# Altium PCB test.PcbDoc
Units mm, origin at the board's own origin, x right, y up, seen from the top; angles counter-clockwise.
Board outline 80 x 60 mm, 4 copper layers (Top Layer, GND, VCC, Bottom Layer), stack 0.783 mm thick; 105 components, 61 nets, 317 pads, 86 vias.
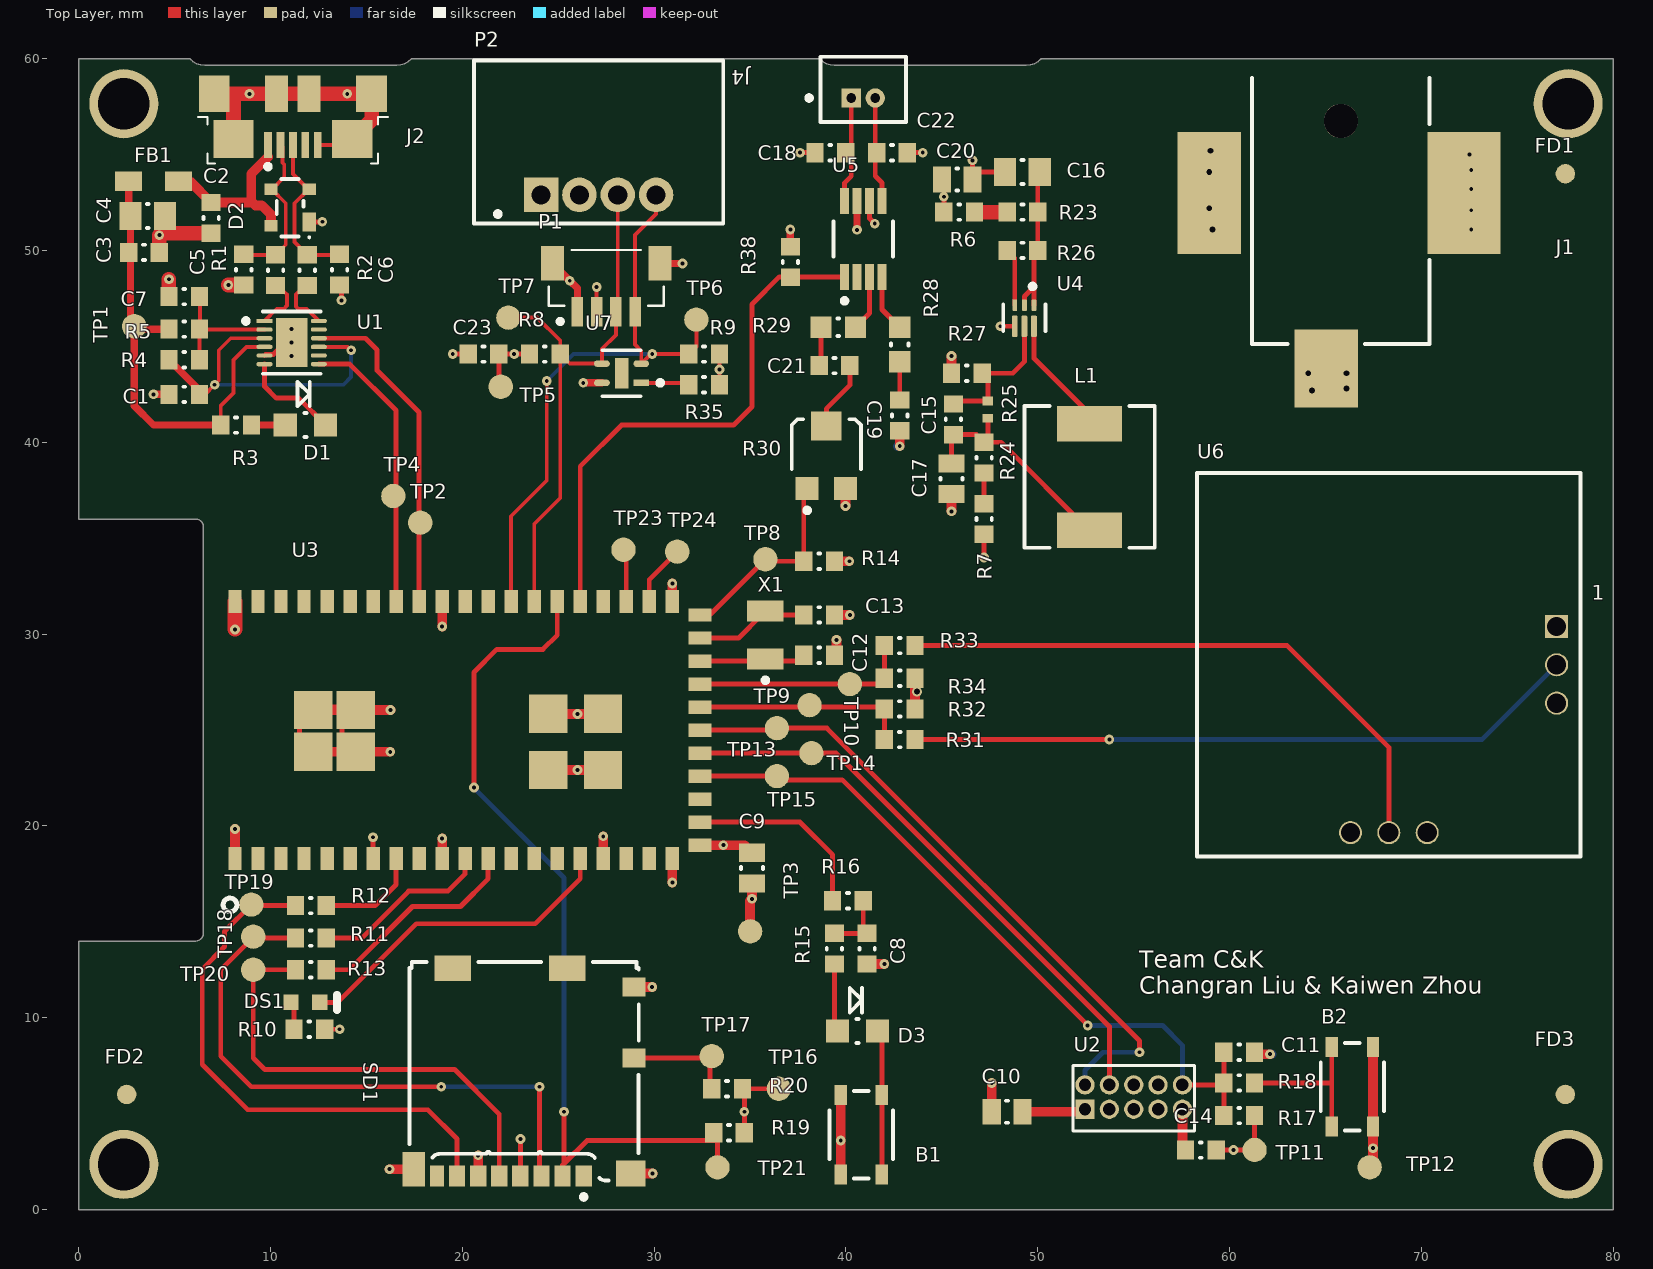
[diagram p0: Top Layer view]
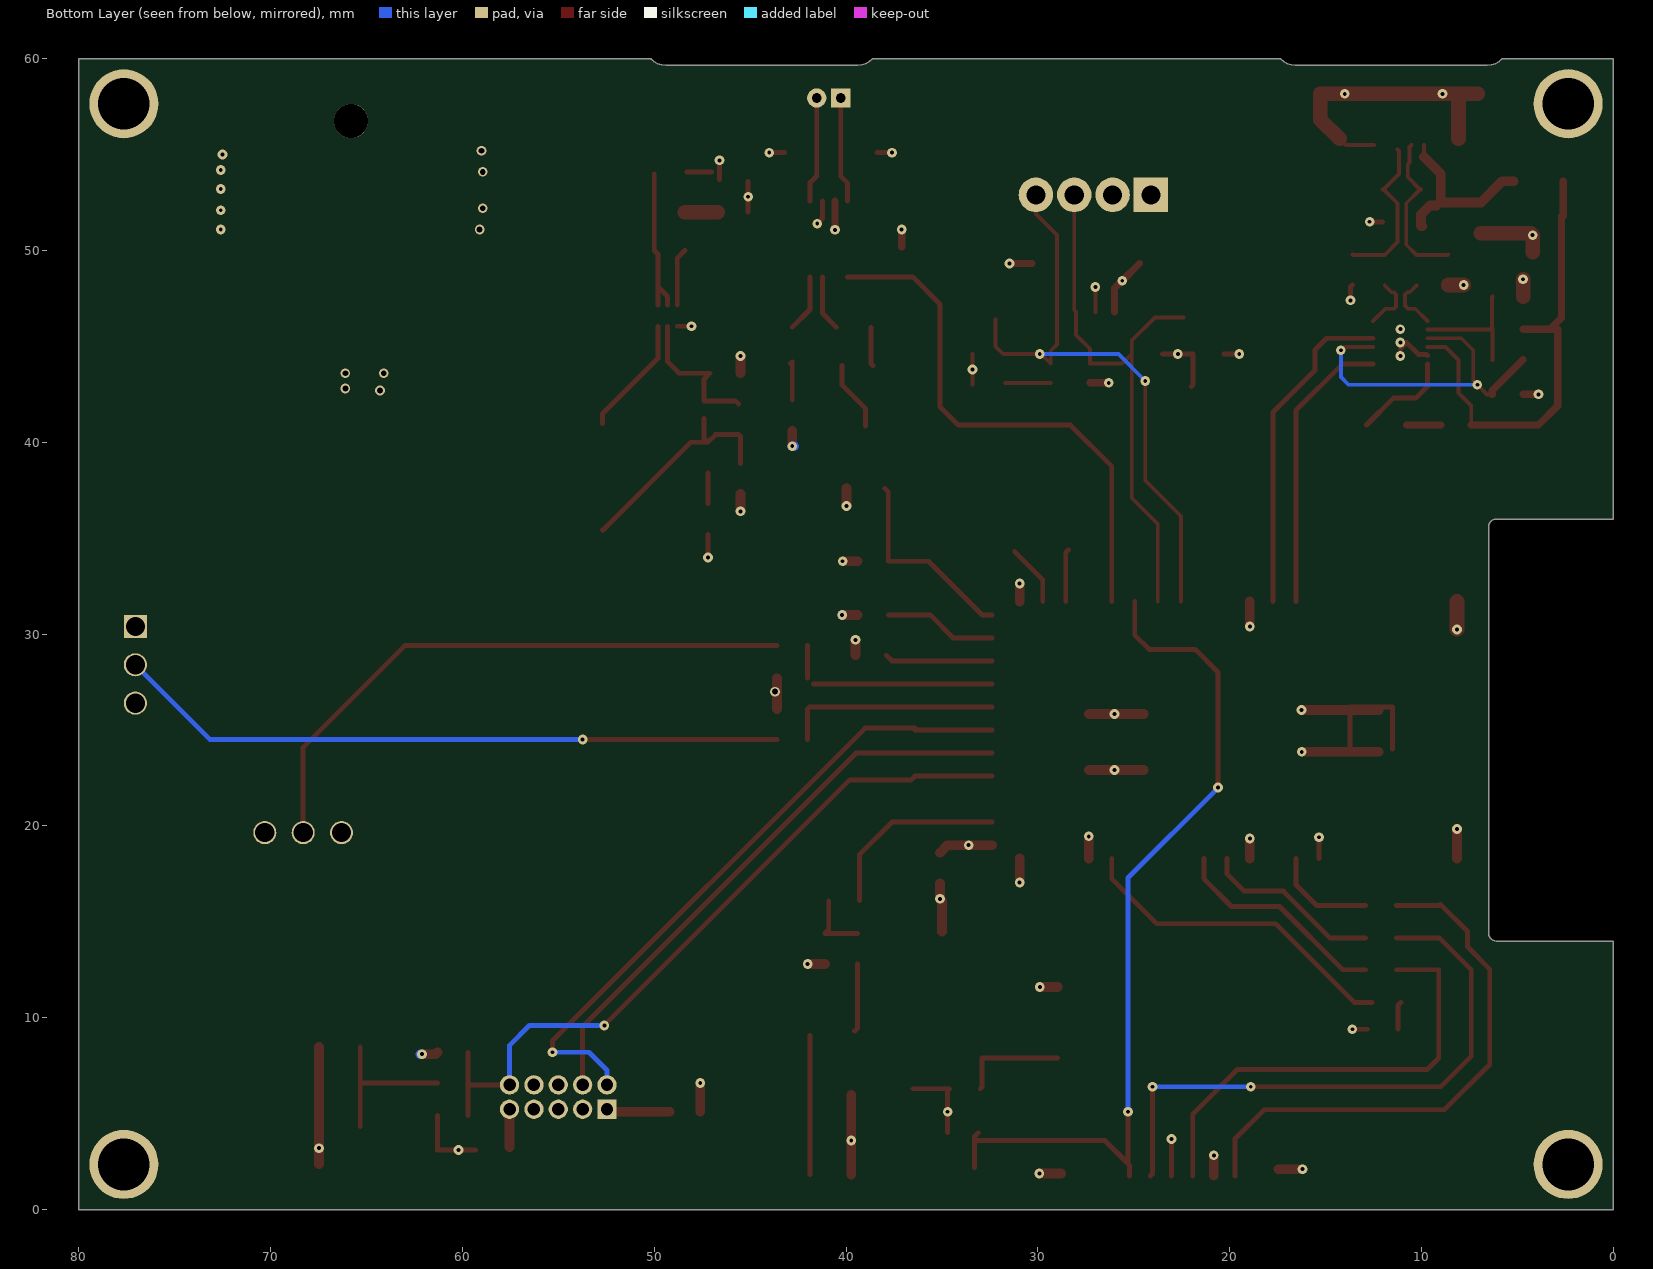
[diagram p1: Bottom Layer view, seen from below]
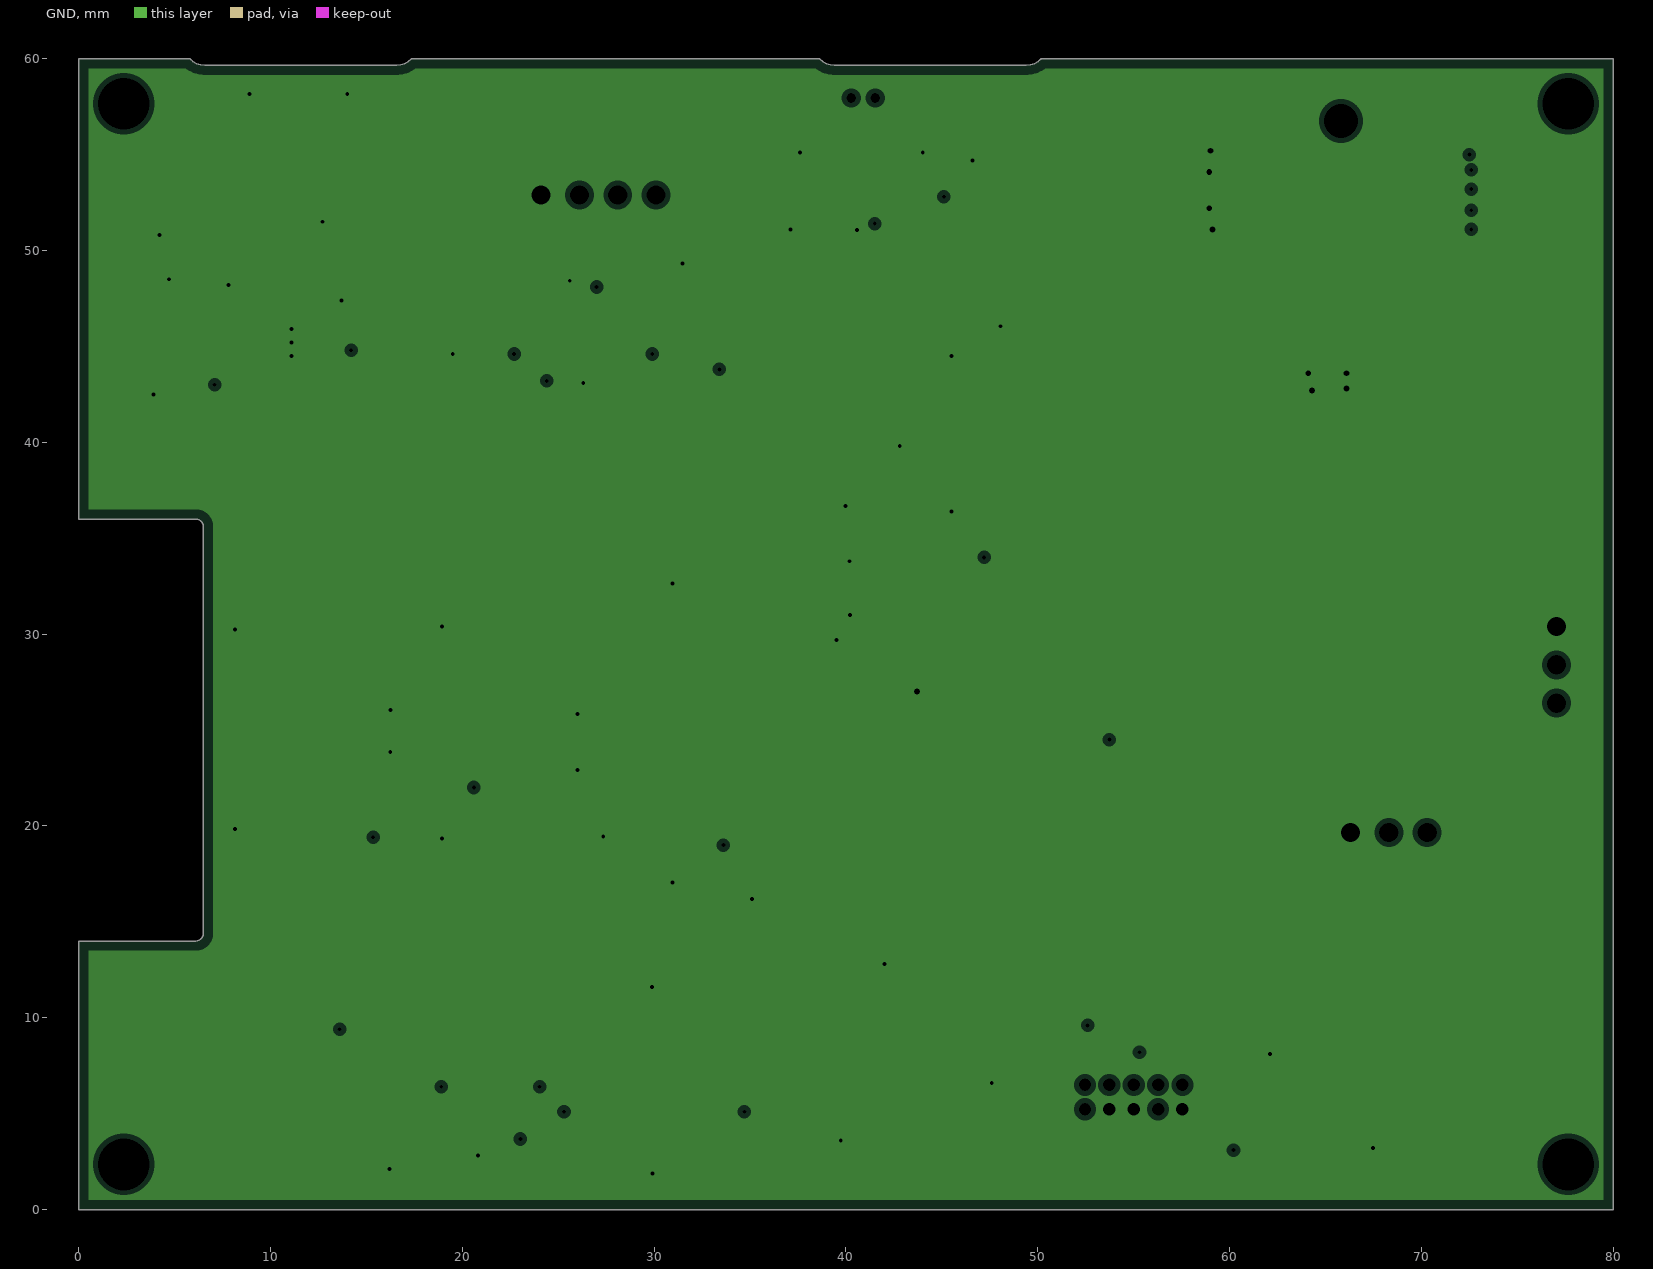
[diagram p2: GND, clearances drawn from the general rule]
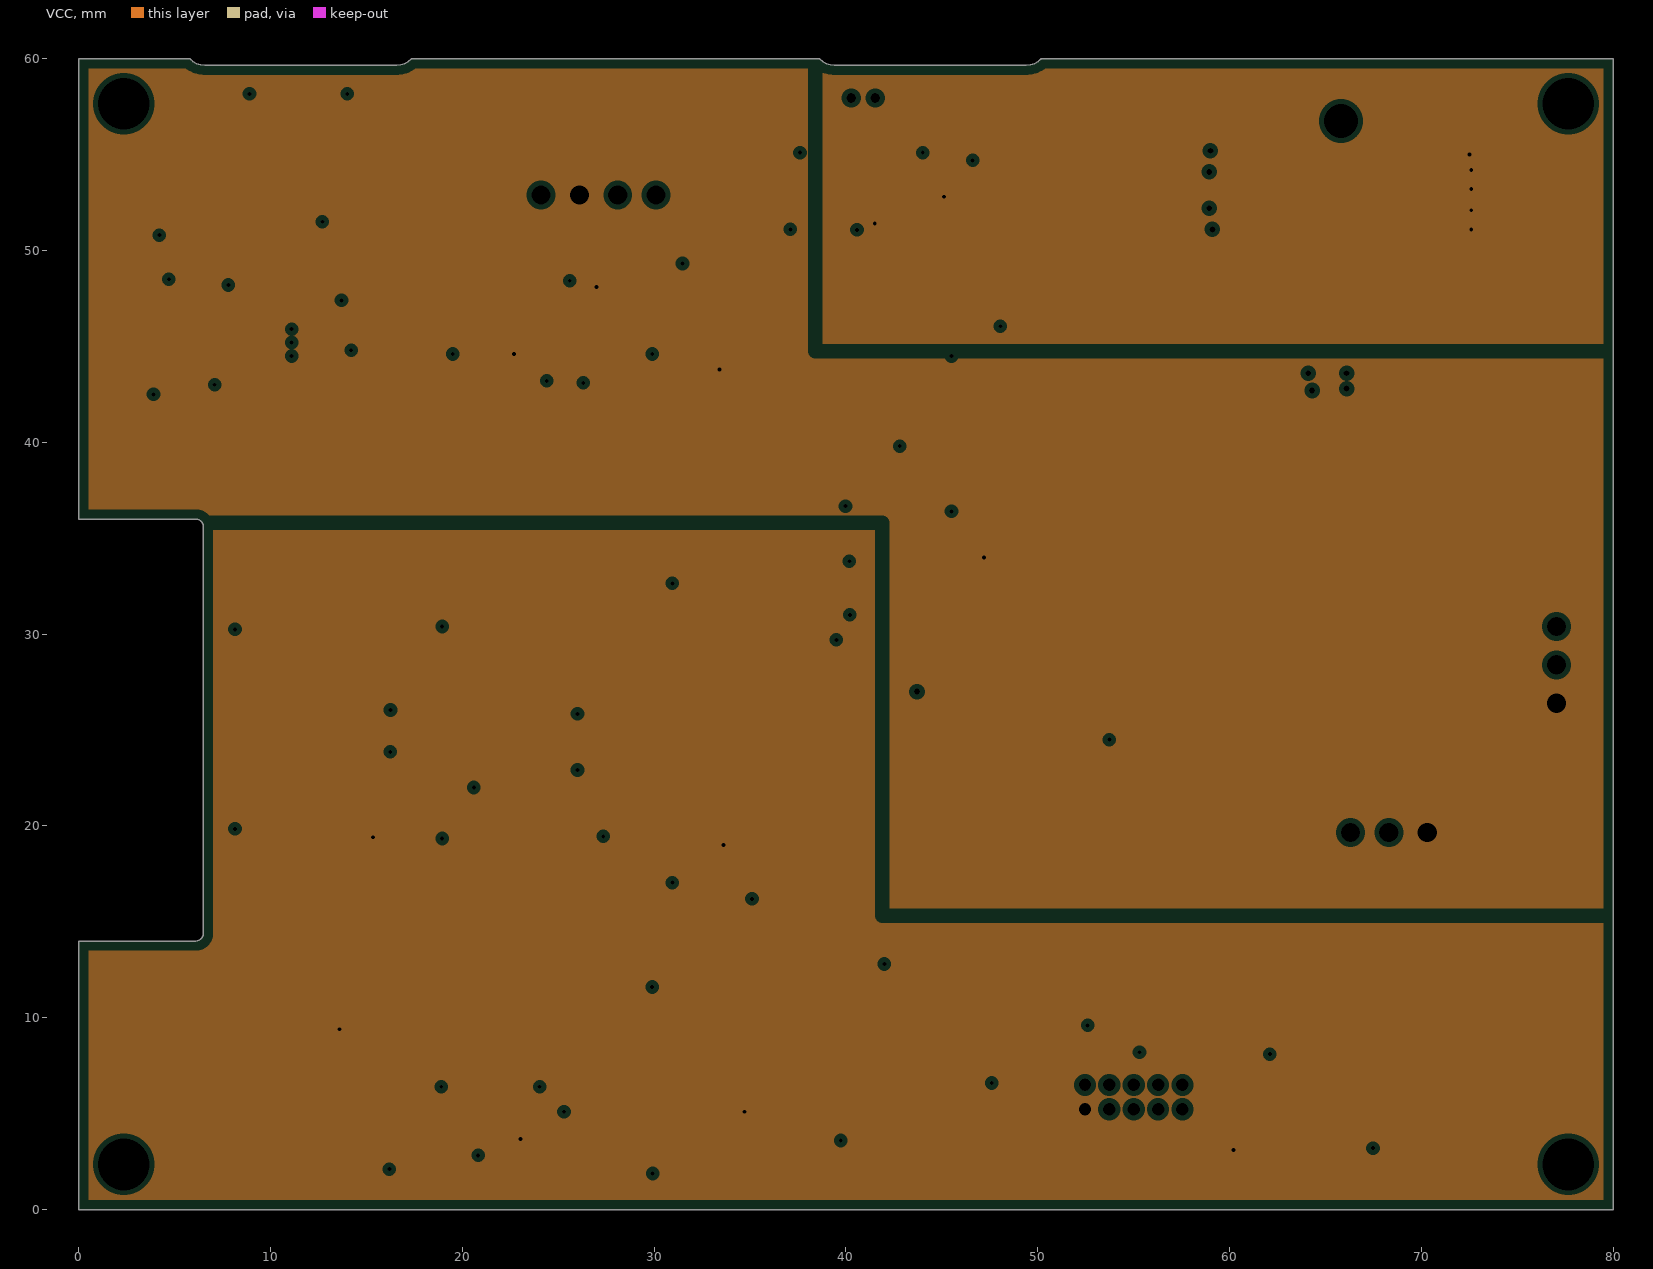
[diagram p3: VCC, clearances drawn from the general rule]

## Layer stack, top to bottom
Top Solder: solder mask 0.0254, Solder Resist, Dk 3.5
Top Layer: signal copper 0.0381
Dielectric1: core 0.254, PP-006, Dk 4.2
GND: plane copper 0.036, net GND
Dielectric 3: prepreg 0.127, Dk 4.2
VCC: plane copper 0.036
Dielectric 2: core 0.254, Dk 4.2
Bottom Layer: signal copper 0.0381
Bottom Solder: solder mask 0.0254, Solder Resist, Dk 3.5

## Board outline
6.1,14 0,14 0,0 80,0 80,60 50.175,60 50.014,59.852 49.825,59.741 49.618,59.673 49.4,59.65 39.4,59.65 39.183,59.673 38.975,59.741 38.786,59.851 38.625,59.999 17.341,60 17.18,59.852 16.991,59.741 16.784,59.673 16.566,59.65 6.566,59.65 6.349,59.673 6.141,59.741 5.952,59.851 5.791,59.999 0,60 0,36 6.1,36 6.189,35.99 6.274,35.961 6.35,35.913 6.413,35.85 6.461,35.774 6.49,35.689 6.5,35.6 6.5,14.4 6.49,14.311 6.461,14.226 6.413,14.15 6.35,14.087 6.274,14.039 6.189,14.01

## Design rules (kind name [scope] priority, off if disabled: settings)
AcuteAngle [All] p1 off: minimum=6.00000000000000E+0001 checktracksonly=TRUE
AssemblyTestPointUsage [All] p1 off: allowmultiple=TRUE
AssemblyTestpoint [All] p1 off: testpointundercomponent=TRUE minsize=0.762 maxsize=2.54 preferedsize=1.524 minholesize=0 maxholesize=1.016 preferedholesize=0.813 testpointgrid=0.025 usegrid=FALSE gridtolerance=0 allowsidebottom=TRUE
Clearance [All] p1: gap=0.152 ignorepadtopadclearanceinfootprint=FALSE except(0: Arc-Hole Track-Hole SMDPad-Hole THPad-Hole Via-Hole Fill-Hole Poly-Hole Region-Hole Text-Hole)
ComponentClearance [All] p1: gap=0 collisioncheckmode=3 verticalgap=0 showdistances=FALSE
DiffPairsRouting [All] p1: maxlimit=0.254 minlimit=0.152 mostfreqgap=0.254 toplayer_minwidth=0.152 toplayer_maxwidth=0.635 toplayer_prefwidth=0.381 bottomlayer_minwidth=0.152 bottomlayer_maxwidth=0.635 bottomlayer_prefwidth=0.381 maxuncoupledlength=12.7
FabricationTestPointUsage [All] p1 off: valid=0 allowmultiple=TRUE
FabricationTestpoint [All] p1 off: side=2 testpointundercomponent=TRUE minsize=0.762 maxsize=2.54 preferedsize=1.524 minholesize=0 maxholesize=1.016 preferedholesize=0.813 testpointgrid=0.025 allowsidebottom=TRUE usegrid=FALSE gridtolerance=0
HoleSize [All] p1: absolutevalues=TRUE maxlimit=3.81 minlimit=0.203 maxpercent=80.000 minpercent=20.000
HoleToHoleClearance [All] p1: gap=0 allowstackedmicrovias=TRUE
MinimumAnnularRing [All] p1 off: minimumring=0.152
MinimumSolderMaskSliver [All] p1: minsoldermaskwidth=0
PlaneClearance [All] p1: clearance=0.254
PlaneConnect [All] p1: planeconnectstyle=Relief reliefexpansion=0.508 reliefentries=4 reliefconductorwidth=0.254 reliefairgap=0.254
PolygonConnect [All] p1: connectstyle=Relief reliefconductorwidth=0.254 reliefentries=4 polygonreliefangle="45 Angle" airgapwidth=0.254
RoutingVias [All] p1: holewidth=0.203 width=0.508 viastyle="Through Hole" minholewidth=0.203 minwidth=0.508 maxholewidth=0.762 maxwidth=1.27
SMDNeckDown [All] p1 off: percent=90.000
SMDToCorner [All] p1 off: distance=0
SMDToPlane [All] p1 off: distance=0
SilkToSilkClearance [All] p1: silktosilkclearance=0
SilkToSolderMaskClearance [IsPad] p1: minsilkscreentomaskgap=0 clearancetoexposedcopper=TRUE
SolderMaskExpansion [All] p1: expansion=0.051 istentingtop=FALSE
ViasUnderSMD [All] p1: allowed=FALSE
Width [All] p1: maxlimit=25.4 minlimit=0.152 preferedwidth=0.254
17 further rules are at their usual default settings.

## Classes and differential pairs
component class U_Thumbstick: R31 R32 R33 R34
component class Designator: C23 R35 U7
component class U_Memory: C13 R27 R28 SD1 TP15 TP17 TP18 TP19 TP20 TP21
component class U_MCU: B2 C8 C9 C10 C11 D3 R15 R16 R25 R26 R31 TP13 TP21 TP23 TP24 U2 X1
component class U_3.3VBuck: C13 C16 C17 L1 R23 R24 R25 R26 R27 U2
component class U_FTDI: C1 C2 C3 C4 C5 C6 C7 D2 FB1 J4 R1 R2 R3 R4 R5 U1
component class U_Audio: C18 C19 C20 C21 C22 J4 R28 R29 R30 U5
component class MAIN: DS1 FD1 FD2 FD3 J2 P1 P2 R6 R11 R13 R17 R20 R25 R26 R27 R28 R38 TP1 TP2 TP3 TP4 TP5 TP15 TP17 TP18 TP19 TP20
differential pair USB_FTDI_DATA_4: +USB_FTDI_DATA_4_P -USB_FTDI_DATA_4_N
differential pair USB_DATA: +USB_DATA_P -USB_DATA_N

## Components (designator, comment, footprint, x,y, rotation, side; value= is the part's Value field where it differs from the comment)
B1 "PTS810 SJK 250 SMTR LFS" "PTS810 SJK 250 SMTR LFS" 40.8,3.9 r270 top
B2 "PTS810 SJK 250 SMTR LFS" "PTS810 SJK 250 SMTR LFS" 66.4,6.4 r90 top
C1 "100nF 16V" CAPC0603(1608)100_N 5.5,42.5 r0 top
C2 "10nF 16V" CAPC0603(1608)100_N 6.9,51.7 r90 top
C3 "100nF 16V" CAPC0603(1608)100_N 3.4,49.9 r180 top
C4 "4.7uF 16V" CAPC0805(2012)145_N 3.6,51.8 r180 top
C5 "47pF 16V" CAPC0603(1608)100_N 8.6,49 r90 top
C6 "47pF 16V" CAPC0603(1608)100_N 13.6,49 r90 top
C7 "100nF 16V" CAPC0603(1608)100_N 5.5,47.6 r0 top
C8 "1uF 16V" CAPC0603(1608)100_N 41.1,13.6 r90 top
C9 "10uF 16V" CAPC0805(2012)145_L 35.1,17.8 r90 top
C10 "10uF 16V" CAPC0805(2012)145_L 48.4,5.1 r0 top
C11 "1uF 16V" CAPC0603(1608)100_N 60.5,8.2 r180 top
C12 "18pF 16V" CAPC0603(1608)100_N 38.6,28.9 r180 top
C13 "18pF 16V" CAPC0603(1608)100_N 38.6,31 r180 top
C14 "CAP 100nF 16V 0603(1608)" CAPC0603(1608)100_N 58.5,3.1 r0 top
C15 "120pF 25V" CAPC0603(1608)100_N 45.6,41.2 r270 top
C16 "4.7uF 16V" CAPC0805(2012)145_N 49.2,54.1 r0 top
C17 "22uF 10V" CAPC0805(2012)100_L 45.5,38.1 r90 top
C18 "220pF 10V" CAPC0603(1608)100_N 39.183,55.1 r0 top
C19 "1uF 16V" CAPC0603(1608)100_N 42.8,41.4 r270 top
C20 "10uF 16V" CAPC0805(2012)145_L 45.8,53.7 r180 top
C21 "1uF 16V" CAPC0603(1608)100_N 39.4,44 r0 top
C22 "220pF 10V" CAPC0603(1608)100_N 42.4,55.1 r180 top
C23 "100nF 16V" CAPC0603(1608)100_N 21.1,44.6 r0 top
D1 "LTST-C170CKT" LTST-C170CKT_V 11.815,40.9 r0 top
D2 "PRTR5V0U2X,215" NXP-SOT143B-4_V 11.02,52.236 r180 top
D3 "LTST-C170CKT" LTST-C170CKT_V 40.6,9.3 r0 top
DS1 "LTST-C191KGKT" LITE-ON-LTST-C191KRKT-2_V 11.815,10.8 r0 top
FB1 "BLM21PG221SN1D" MURA-BLM21-B20-CHIP-2_V2 3.9,53.609 r180 top
FD1 "40x100mm" Fiducial_FT#1 77.05,53.2 r0 top
FD2 "40x100mm" Fiducial_FT#2 2.5,5.7 r0 top
FD3 "40x100mm" Fiducial_FT#3 77.05,6.6 r0 top
J1 "RASM722PTR13X" FP-RASM722PTR13X-MFG 65.8,52.5 r180 top
J2 "ZX62R-B-5P" HIRO-ZX62R-B-5P_V 11.165,56.828 r180 top
J4 "53047-0210" FP-53047-0210-MFG 40.9,58.4 r180 top
L1 "SPM6550T-R47M-HZ" FP-SPM6550-MFG 52.7,38.2 r270 top
P1 "BM04B-SRSS-TBT(LF)(SN)" CONN_BM04B-SRSS-TBT(LF)(SN) 27.5,46.8 r0 top
P2 "B4B-PH-SM4-TB(LF)(SN)" TECO-640456-4 27.1,52.9 r180 top
R1 "27R 1%" RESC0603(1608)_N 10.262,48.971 r270 top
R2 "27R 1%" RESC0603(1608)_N 11.913,48.971 r270 top
R3 "1K 1%" RESC0603(1608)_N 8.2,40.9 r180 top
R4 "Jumper" RESC0603(1608)_N 5.5,44.3 r0 top
R5 "1K 1%" RESC0603(1608)_N 5.5,45.9 r0 top
R6 "Jumper" RESC0603(1608)_N 45.9,52 r0 top
R7 "Jumper" RESC0603(1608)_N 47.2,36 r270 top
R8 "10K 1%" RESC0603(1608)_N 24.3,44.6 r180 top
R9 "10K 1%" RESC0603(1608)_N 32.6,44.6 r0 top
R10 "1K 1%" RESC0603(1608)_N 12.02,9.4 r180 top
R11 "27R 1%" RESC0603(1608)_N 12.1,14.15 r180 top
R12 "27R 1%" RESC0603(1608)_N 12.1,15.85 r180 top
R13 "27R 1%" RESC0603(1608)_N 12.1,12.5 r180 top
R14 "10K 1%" RESC0603(1608)_N 38.6,33.8 r180 top
R15 "100R 1%" RESC0603(1608)_N 39.4,13.6 r90 top
R16 "10K 1%" RESC0603(1608)_N 40.1,16.1 r0 top
R17 "10K 1%" RESC0603(1608)_N 60.5,4.9 r0 top
R18 "100R 1%" RESC0603(1608)_N 60.5,6.6 r180 top
R19 "10K 1% 0603(1608)" RESC0603(1608)_N 33.9,4 r0 top
R20 "10K 1% 0603(1608)" RESC0603(1608)_N 33.8,6.3 r0 top
R23 "Jumper" RESC0603(1608)_N 49.2,52 r0 top
R24 "Jumper" RESC0603(1608)_N 47.2,39.2 r270 top
R25 "453K 1%" RESC0402(1005)_L 47.4,41.7 r270 top
R26 "100K 1%" RESC0603(1608)_N 49.2,50 r180 top
R27 "100K 1%" RESC0603(1608)_N 46.3,43.6 r0 top
R28 "100R 1%" RESC0603(1608)_M 42.8,45.1 r90 top
R29 "100R 1%" RESC0603(1608)_M 39.6,46 r0 top
R30 "TC33X-2-103E" BOUR-TC33X-2_V 38.975,39.4 r90 top
R31 "10K 1%" RESC0603(1608)_N 42.8,24.5 r0 top
R32 "10K 1%" RESC0603(1608)_N 42.8,26.1 r180 top
R33 "10K 1%" RESC0603(1608)_N 42.8,29.4 r0 top
R34 "10K 1%" RESC0603(1608)_N 42.8,27.7 r180 top
R35 "Jumper" RESC0603(1608)_N 32.6,43 r180 top
R38 "10K 1%" RESC0603(1608)_N 37.1,49.4 r270 top
SD1 "104031-0811" MOLX-104031-0811_V 23.212,7.168 r0 top locked
TP1 "0.1\" Pad" PCBComponent 2.895,46.05 r90 top
TP2 "0.1\" Pad" PCBComponent 17.8,35.812 r90 top
TP3 "0.1\" Pad" PCBComponent 35,14.5 r90 top
TP4 "0.1\" Pad" PCBComponent 16.4,37.2 r90 top
TP5 "0.1\" Pad" PCBComponent 22,42.9 r90 top
TP6 "0.1\" Pad" PCBComponent 32.2,46.4 r90 top
TP7 "0.1\" Pad" PCBComponent 22.4,46.5 r90 top
TP8 "0.1\" Pad" PCBComponent 35.8,33.9 r90 top
TP9 "0.1\" Pad" PCBComponent 38.1,26.3 r90 top
TP10 "0.1\" Pad" PCBComponent 40.2,27.396 r90 top
TP11 "0.1\" Pad" PCBComponent 61.3,3.106 r90 top
TP12 "0.1\" Pad" PCBComponent 67.3,2.2 r90 top
TP13 "0.1\" Pad" PCBComponent 36.4,25.1 r90 top
TP14 "0.1\" Pad" PCBComponent 38.2,23.796 r90 top
TP15 "0.1\" Pad" PCBComponent 36.4,22.6 r90 top
TP16 "0.1\" Pad" PCBComponent 36.5,6.3 r90 top
TP17 "0.1\" Pad" PCBComponent 33,8 r90 top
TP18 "0.1\" Pad" PCBComponent 9.1,14.226 r90 top
TP19 "0.1\" Pad" PCBComponent 9,15.9 r90 top
TP20 "0.1\" Pad" PCBComponent 9.1,12.5 r90 top
TP21 "0.1\" Pad" PCBComponent 33.3,2.2 r90 top
TP23 "0.1\" Pad" PCBComponent 28.4,34.4 r90 top
TP24 "0.1\" Pad" PCBComponent 31.2,34.3 r90 top
U1 "FT234XD-R" FP-DFN-12-IPC_B 11.1,45.2 r0 top
U2 "20021111-00010T4LF" 20021111-00010T4LF 55,6.5 r0 top
U3 "SAMW25H18-MR510PB" SAMW25H18-MR510PB 20.265,25 r180 top locked
U4 "TPS62827DMQR" TPS62827DMQR 49.3,46.5 r270 top
U5 "PAM8302AASCR" FP-MSOP-8-MFG 40.9,50.6 r90 top
U6 "2765 Thumbstick" thumbstick 68.3,28.4 r0 top
U7 "SHTC3" FP-SHTC3-IPC_A 28.3,43.6 r180 top
X1 "ABS07-32.768KHz-T" ABRA-ABS07-2_V 35.8,29.944 r90 top

## Footprints (in the part's own frame and the unit in brackets; to place one, negate y for a bottom-side part, rotate by r counter-clockwise, add the part's x,y. Pads: shape width x height; smd on the part's side, far side on the other; paste and mask are expansions set on the pad)
20021111-00010T4LF [mm] "CONN HEADER 10POS UNSHD VERT T/H"
  rect 1.006x1.006 hole 0.65: 1(-2.54,-1.27)
  round 1.006 hole 0.65: 2(-2.54,0) 3(-1.27,-1.27) 4(-1.27,0) 5(0,-1.27) 6(0,0) 7(1.27,-1.27) 8(1.27,0) 9(2.54,-1.27) 10(2.54,0)
  silkscreen extent -3.17,-2.41 3.17,1.02, body extent -3.17,-2.33 3.17,1.06, height 5.5
ABRA-ABS07-2_V [mm] "Hand Drawn, 2-Leads, Body 3.2x1.5mm, Pitch 2.5mm"
  rect 1.1x1.9 smd: 1(-1.25,0) 2(1.25,0)
  silkscreen extent -2.47,-0.13 -2.23,0.12, body extent -1.6,-0.75 1.6,0.75, height 0.9
BOUR-TC33X-2_V [mm] "SMD, 3-Leads, Body 3.8x3.6mm"
  rect 1.2x1.2 smd: 1(-1.8,1) 3(-1.8,-1)
  rect 1.5x1.6 smd: 2(1.45,0)
  silkscreen extent -3.07,-1.8 1.8,1.8, body extent -2,-1.8 1.96,1.8, height 1.15
CAPC0603(1608)100_N [mm] "Chip Capacitor, Body 1.6x0.8mm, Height 1.0mm, IPC Medium Density"
  rect 0.9x1 smd: 1(-0.8,0) 2(0.8,0)
  silkscreen extent -0.05,-0.4 0.05,0.4, body extent -0.87,-0.48 0.88,0.47, height 1
CAPC0805(2012)100_L [mm] "Chip Capacitor, Body 2.0x1.2mm, Height 1.0mm, IPC High Density"
  rect 0.95x1.35 smd: 1(-0.8,0) 2(0.8,0)
  silkscreen extent -0.05,-0.58 0.05,0.58, body extent -1.1,-0.72 1.1,0.72, height 1
CAPC0805(2012)145_L [mm] "Chip Capacitor, Body 2.0x1.2mm, Height 1.45mm, IPC High Density"
  rect 0.95x1.35 smd: 1(-0.8,0) 2(0.8,0)
  silkscreen extent -0.05,-0.58 0.05,0.58, body extent -1.1,-0.72 1.1,0.72, height 1.45
CAPC0805(2012)145_N [mm] "Chip Capacitor, Body 2.0x1.2mm, Height 1.45mm, IPC Medium Density"
  rect 1.15x1.45 smd: 1(-0.9,0) 2(0.9,0)
  silkscreen extent -0.05,-0.62 0.05,0.63, body extent -1.1,-0.72 1.1,0.73, height 1.45
CONN_BM04B-SRSS-TBT(LF)(SN) [mm]
  rect 0.6x1.55 smd: 1(-1.5,0) 2(-0.5,0) 3(0.5,0) 4(1.5,0)
  rect 1.2x1.8 smd: SH1(-2.8,2.525) SH2(2.8,2.525)
  silkscreen extent -3,-0.62 3,3.22, body extent -3,-0.37 3,3.23, height 4.36
Fiducial_FT#1 [mm]
  round 1.016 smd paste-0.762 mask+0.762: ""(0.45,0.8)
Fiducial_FT#2 [mm]
  round 1.016 smd paste-0.762 mask+0.762: ""(0,0.3)
Fiducial_FT#3 [mm]
  round 1.016 smd paste-0.762 mask+0.762: ""(0.45,-0.6)
FP-53047-0210-MFG [mm]
  rect 1x1 hole 0.5 paste-1000 mask+0: 1(0.625,0.45)
  round 1 hole 0.5 paste-1000 mask+0: 2(-0.625,0.45)
  silkscreen extent -2.22,-1.7 2.95,1.7, body extent -2.32,-1.8 2.32,1.8, height 0.25
FP-DFN-12-IPC_B [mm]
  rect 0.84x0.222 smd paste+0 mask+0: 1(-1.416,1.125)
  rrect100% 0.84x0.222 smd paste+0 mask+0: 2(-1.416,0.675) 3(-1.416,0.225) 4(-1.416,-0.225) 5(-1.416,-0.675) 6(-1.416,-1.125) 7(1.416,-1.125) 8(1.416,-0.675) 9(1.416,-0.225) 10(1.416,0.225) 11(1.416,0.675) 12(1.416,1.125)
  rect 1.65x2.55 smd paste-1000 mask+0: 13(0,0)
  silkscreen extent -2.51,-1.63 1.5,1.63
FP-MSOP-8-MFG [mm]
  rect 1.35x0.45 smd paste+0 mask+0: 1(-1.975,0.975) 2(-1.975,0.325) 3(-1.975,-0.325) 4(-1.975,-0.975) 5(1.975,-0.975) 6(1.975,-0.325) 7(1.975,0.325) 8(1.975,0.975)
  silkscreen extent -3.35,-1.55 0.92,1.55, body extent -2.75,-1.65 2.75,1.65, height 0.25
FP-RASM722PTR13X-MFG [mm]
  rect 3.3x4.06 smd paste+0 mask+0: 1(0.76,8.65)
  rect 3.81x6.35 smd paste+0 mask+0: 2(-6.43,-0.49)
  rect 3.3x6.35 smd paste+0 mask+0: 3(6.86,-0.49)
  round 1.78 hole 1.78 unplated paste-1000 mask+0: ""(0,-4.25)
  silkscreen extent -4.63,-6.5 4.63,7.38, body extent -8.43,-7.48 8.61,10.78, height 0.25
FP-SHTC3-IPC_A [mm]
  rect 0.821x0.341 smd paste+0 mask+0: 1(-1.025,0.5)
  rrect100% 0.821x0.341 smd paste+0 mask+0: 2(-1.025,-0.5) 3(1.025,-0.5) 4(1.025,0.5)
  rect 0.7x1.6 smd paste-1000 mask+0: 5(0,0)
  silkscreen extent -2.14,-1.2 1,1.2, body extent -1.94,-1.5 1.94,1.5, height 0.25
FP-SPM6550-MFG [mm]
  rect 1.85x3.4 smd paste+0 mask+0: 1(-2.775,0) 2(2.775,0)
  silkscreen extent -3.7,-3.4 3.7,3.4, body extent -3.8,-3.5 3.8,3.5, height 0.25
HIRO-ZX62R-B-5P_V [mm] "USB Micro-B R/A Connector"
  rect 0.4x1.35 smd: 1(1.3,1.338) 2(0.65,1.338) 3(0,1.338) 4(-0.65,1.338) 5(-1.3,1.338)
  rect 2.1x2 smd: 6(-3.1,1.012) 11(3.1,1.012)
  rect 1.6x1.9 smd: 7(-4.1,-1.338) 10(4.1,-1.338)
  rect 1.2x1.9 smd: 8(-0.85,-1.338) 9(0.85,-1.338)
  silkscreen extent -4.95,-0.13 4.95,2.58, body extent -4.4,-3.95 4.4,1.78, height 2.71
LITE-ON-LTST-C191KRKT-2_V [mm] "Chip, 2-Leads, Body 1.6x0.8mm"
  rect 0.8x0.8 smd: 1(-0.75,0) 2(0.75,0)
  silkscreen extent 1.65,-0.4 1.65,0.4, body extent -0.8,-0.4 0.8,0.4, height 0.55
LTST-C170CKT_V [mm] "SMD, 2-Leads, Body 2x1.25mm"
  rect 1.2x1.2 smd: 1(-1.05,0) 2(1.05,0)
  silkscreen extent -0.41,-0.63 0.23,2.25, body extent -1,-0.63 1,0.63, height 1.1
MOLX-104031-0811_V [mm] "Micro SD, 8-Leads, Body 11.95x11.4mm, Pitch 1.1mm"
  rect 0.85x1.1 smd: 1(3.113,-5.412) 2(2.013,-5.412) 3(0.913,-5.412) 4(-0.188,-5.412) 5(-1.288,-5.412) 6(-2.387,-5.412) 7(-3.487,-5.412)
  rect 0.75x1.1 smd: 8(-4.537,-5.412)
  rect 1.2x1 smd: 9(5.748,0.738) 10(5.748,4.438)
  rect 1.55x1.35 smd: 11(5.573,-5.287)
  rect 1.17x1.8 smd: 12(-5.747,-5.062)
  rect 1.9x1.35 smd: 13(-3.722,5.413) 14(2.248,5.413)
  silkscreen extent -5.97,-6.64 5.98,5.74, body extent -5.97,-5.66 5.98,5.74, height 1.45
MURA-BLM21-B20-CHIP-2_V2 [mm] "Chip Ferrite Bead, 2-Leads, Body 2x1.25mm, Height 1.05mm, 35/70um Land Pad Thickness, 2A Rated Current"
  rect 1.4x1 smd: 1(-1.3,0) 2(1.3,0)
  body extent -1,-0.63 1,0.63, height 1.05
NXP-SOT143B-4_V [mm] "SOT143, 4-Leads, Body 3x1.4mm"
  rect 0.7x1 smd: 1(-1,0.75)
  rect 0.7x0.6 smd: 2(-1,-0.95) 3(1,-0.95) 4(1,0.95)
  silkscreen extent -1.05,-1.5 0.7,1.6, body extent -0.7,-1.5 0.7,1.5, height 1.1
PCBComponent [mm]
  round 1.27 smd mask+0: 1(0,0)
  body extent -0.63,-0.63 0.64,0.63, height 0
"PTS810 SJK 250 SMTR LFS" [mm] "SWITCH TACTILE SPST-NO 0.05A 16V"
  rect 1.05x0.65 smd: 1(-2.075,1.075) 2(2.075,1.075) 3(-2.075,-1.075) 4(2.075,-1.075)
  silkscreen extent -2.29,-1.65 2.29,1.65, body extent -2.3,-1.6 2.3,1.6, height 2.5
RESC0402(1005)_L [mm] "Chip Resistor, Body 1.0x0.5mm, IPC High Density"
  rect 0.45x0.55 smd: 1(-0.45,0) 2(0.45,0)
  body extent -0.52,-0.27 0.53,0.28, height 0.4
RESC0603(1608)_M [mm] "Chip Resistor, Body 1.6x0.8mm, IPC Low Density"
  rect 1.1x1.1 smd: 1(-0.9,0) 2(0.9,0)
  silkscreen extent -0.05,-0.45 0.05,0.45, body extent -0.85,-0.47 0.85,0.47, height 0.6
RESC0603(1608)_N [mm] "Chip Resistor, Body 1.6x0.8mm, IPC Medium Density"
  rect 0.9x1 smd: 1(-0.8,0) 2(0.8,0)
  silkscreen extent -0.05,-0.4 0.05,0.4, body extent -0.85,-0.47 0.85,0.47, height 0.6
SAMW25H18-MR510PB [mm] "RF TXRX MODULE WIFI TRACE ANT"
  rect 2x2 smd: 0(-7.065,-0.839) 0(-7.065,2.085) 0(-4.21,-0.839) 0(-4.21,2.085)
  rect 2x2 smd mask+0.127: 0(5.828,-1.045) 0(5.828,1.137) 0(8.046,-1.045) 0(8.046,1.137)
  rect 0.7x1.2 smd: 1(12.121,6.7) 2(10.921,6.7) 3(9.721,6.7) 4(8.521,6.7) 5(7.321,6.7) 6(6.121,6.7) 7(4.921,6.7) 8(3.721,6.7) 9(2.521,6.7) 10(1.321,6.7) 11(0.121,6.7) 12(-1.079,6.7) 13(-2.279,6.7) 14(-3.479,6.7) 15(-4.679,6.7) 16(-5.879,6.7) 17(-7.079,6.7) 18(-8.279,6.7) 19(-9.479,6.7) 20(-10.679,6.7) 32(-10.679,-6.7) 33(-9.479,-6.7) 34(-8.279,-6.7) 35(-7.079,-6.7) 36(-5.879,-6.7) 37(-4.679,-6.7) 38(-3.479,-6.7) 39(-2.279,-6.7) 40(-1.079,-6.7) 41(0.121,-6.7) 42(1.321,-6.7) 43(2.521,-6.7) 44(3.721,-6.7) 45(4.921,-6.7) 46(6.121,-6.7) 47(7.321,-6.7) 48(8.521,-6.7) 49(9.721,-6.7) 50(10.921,-6.7) 51(12.121,-6.7)
  rect 1.2x0.7 smd: 21(-12.12,6.004) 22(-12.12,4.804) 23(-12.12,3.604) 24(-12.12,2.404) 25(-12.12,1.204) 26(-12.12,0.004) 27(-12.12,-1.196) 28(-12.12,-2.396) 29(-12.12,-3.596) 30(-12.12,-4.796) 31(-12.12,-5.996)
  silkscreen extent 12.02,8.76 12.74,9.48, body extent -12.89,-7.45 20.98,7.46, height 3.37
TECO-640456-4 [mm] "Through Hole, 4-Leads, Body 10.16x5.72mm, Pitch 2.54mm"
  rect 1.8x1.8 hole 1 paste+0 mask+0.08: 1(3,0)
  round 1.8 hole 1 paste+0 mask+0.08: 2(1,0) 3(-1,0) 4(-3,0)
  silkscreen extent -6.5,-7 6.5,1.5, body extent -5.97,-6.35 5.97,0.25, height 5.01
thumbstick [mm]
  rect 1.2x1.2 hole 1: 1(8.75,2)
  round 1.2 hole 1: 2(8.75,0) 3(8.75,-2) 4(-2,-8.75) 5(0,-8.75) 6(2,-8.75)
  silkscreen extent -10,-10 10,10, body extent -8.85,-8.97 8.85,8.98, height 12
TPS62827DMQR [mm]
  rrect40% 0.6x0.25 smd paste+0 mask-1000: 1(-0.65,0) 2(-0.65,-0.5) 6(-0.65,0.5)
  rrect33% 1.1x0.3 smd paste-1000 mask-1000: 3(0.45,0) 4(0.45,-0.5) 5(0.45,0.5)
  silkscreen extent -1.75,-1.1 0.7,1.1, body extent -1.05,-0.87 1.1,0.87, height 0.25

## Part data
B1 B2: "SWITCH TACTILE SPST-NO 0.05A 16V Tactile Switch SPST-NO Top Actuated Surface Mount"
C1 C3 C7 C14 C23: library part CMP-1035-02584-1, "CAP 100nF 16V ?0% 0603 (1608 Metric) Thickness 1mm SMD"
C2: library part CMP-1035-02311-1, "CAP 10nF 16V ?0% 0603 (1608 Metric) Thickness 1mm SMD"
C4 C16: library part CMP-1036-04893-1, "CAP 4.7uF 16V -20% to +80% 0805 (2012 Metric) Thickness 1.45mm SMD"
C5 C6: library part CMP-1035-01048-1, "CAP 47pF 16V ?.5pF 0603 (1608 Metric) Thickness 1mm SMD"
C8 C11 C19 C21: library part CMP-1035-02736-1, "CAP 1uF 16V ?% 0603 (1608 Metric) Thickness 1mm SMD"
C9 C10 C20: library part CMP-1036-04927-1, "CAP 10uF 16V ?0% 0805 (2012 Metric) Thickness 1.45mm SMD"
C12 C13: library part CMP-1035-00738-1, "CAP 18pF 16V ?% 0603 (1608 Metric) Thickness 1mm SMD"
C15: library part CMP-1035-01312-1, "CAP 120pF 25V ?% 0603 (1608 Metric) Thickness 1mm SMD"
C17: library part CMP-1036-04944-1, "CAP 22uF 10V ?0% 0805 (2012 Metric) Thickness 1mm SMD"
C18 C22: library part CMP-1035-01455-1, "CAP 220pF 10V ?% 0603 (1608 Metric) Thickness 1mm SMD"
D1 D3: library part CMP-1674-00001-5, "LED Uni-Color Red, 100 mW, 200 mA, -55 to 85 degC, 2-Pin SMD, RoHS, Tape and Reel"
D2: library part CMP-2000-05285-1, "Ultra Low Capacitance Double Rail-to-Rail ESD Protection Diode, 5.5 V, 1 pF, -40 to 85 degC, 4-Pin SOT143B, RoHS, Tape and Reel"
DS1: library part CMP-2000-05198-1, "Chip LED, Green, 574 nm, 40 pF, -55 to 85 degC, 2-Pin SMD, RoHS, Tape and Reel"
FB1: library part CMP-0686-00610-2, "Chip Ferrite Bead for Power Lines, 220 Ohm, 2000 mA, -55 to 125 degC, 2 x 1.25 x 1.05 mm SMD, Tape and Reel"
FD1 FD2 FD3: library part CMP-00174-A.4, "Fiducial 40x100mm"
J1: library part CMP-47995-000002-1, "CONN PWR JACK 2.1X5.5MM SOLDER"
J2: library part CMP-0031-00001-1, "Connector; USBMicro-B,Reverse type, SMT; 5 Position; Right Angle"
J4: library part CMP-2000-05628-3, "CONN HEADER VERT 2POS 1.25MM"
L1: library part CMP-08253-000017-1, "FIX IND 470NH 26.1A 2.97MOHM SMD"
P1: "Connector Header Surface Mount 4 position 0.039 _1.00mm_"
R1 R2 R11 R12 R13: library part CMP-1012-00331-1, "27R 0.1W 1% 0603 (1608 Metric)  SMD"
R3 R5 R10: library part CMP-1012-00510-1, "1K 0.1W 1% 0603 (1608 Metric)  SMD"
R4 R6 R7 R23 R24 R35: library part CMP-1012-00001-1, "Jumper 0603 (1608 Metric)"
R8 R9 R14 R16 R17 R19 R20 R31 R32 R33 R34 R38: library part CMP-1012-00623-1, "10K 0.1W 1% 0603 (1608 Metric)  SMD"
R15 R18 R28 R29: library part CMP-1012-00397-1, "100R 0.1W 1% 0603 (1608 Metric)  SMD"
R25: library part CMP-1011-00810-1, "453K 0.063W 1% 0402 (1005 Metric)  SMD"
R26 R27: library part CMP-1012-00736-1, "100K 0.1W 1% 0603 (1608 Metric)  SMD"
R30: library part CMP-2100-03695-1, "Trimming Potentiometer, 10000 Ohm, -40 to 100 degC, 3-Pin SMD, RoHS, Tape and Reel"
SD1: library part CMP-2000-05825-1, "Micro SD Card, RA, -25 to 85 degC, 8-Pin SMD, RoHS, Tape and Reel"
TP1 TP2 TP3 TP4 TP5 TP6 TP7 TP8 TP9 TP10 TP11 TP12 TP13 TP14 TP15 TP16 TP17 TP18 TP19 TP20 TP21 TP23 TP24: library part "0.1\" Pad-A.4"
U1: library part CMP-0248-00027-3, "IC USB SERIAL BASIC UART 12DFN"
U2: "CONN HEADER 10POS UNSHD VERT T/H"
U3: "RF TXRX MODULE WIFI TRACE ANT"
U4: "2.4V-5.5V input, 4A step-down converter with 1% Accuracy in 1.5mm x 1.5mm QFN 6-VSON-HR -40 to 125"
U5: library part CMP-12733-000002-1, "IC AMP CLASS D MONO 2.5W 8MSOP"
U6: "JOYSTICK 10K OHM 2 AXIS TH"
U7: library part CMP-144040-000003-1, "SENSOR HUMI/TEMP I2C 2% SMD"
X1: library part CMP-0447-00001-2, "Crystal, 32.768 kHz, 12.5 pF, -40 to 85 degC, SMD Low Profile 3.2 x 1.5 x 0.9 mm, Tape and Reel"

## Free pads (board coordinates)
  round 3.6 hole 2.7 paste-2.6: HH1(2.35,57.65) HH2(77.65,57.65) HH3(2.35,2.35) HH4(77.65,2.35)

## Via types
v1: diameter 0.508, hole 0.203, Top Layer to Bottom Layer, 76 vias
v2: diameter 0.508, hole 0.305, Top Layer to Bottom Layer, 9 vias
v3: diameter 0.508, hole 0.203, Top Layer to Bottom Layer, tented both sides, 1 vias

## Nets (pads, with @x,y where several pads share a name; then routed paths per layer and width w, separated by ;. In a path a pad name is that pad's centre, name@x,y a point inside that pad or via, vN(x,y) a via of type N, cw(c..) or ccw(c..) an arc to the next point about the centre after c; other vN are vias at no path point)
3.3V: C23.2 P1.2 P2.2 R7.2 R8.2 R9.2 R35.1 TP5.1 U6.3 U6.6 | length 7.4
  Top Layer w0.203: P1.2 v1(27,48.1) ; R35.1 v1(33.4,43.8) R9.2
  Top Layer w0.254: TP5.1 21.9,43 C23.2 v1(22.7,44.6) R8.2 ; v1(47.2,34) R7.2
3V3: C9.2 C10.2 C14.2 R10.1 R17.2 R19.2 R20.2 SD1.4 TP11.1 TP16.1 U2.1 U3.7 U3.21 | length 17.9
  Top Layer w0.254: R10.1 v1(13.6,9.4) ; U3.7 v1(15.344,19.411) ; SD1.4 v1(23.025,3.675) ; R19.2 v1(34.7,5.1) 34.7,6.2 R20.2 TP16.1 ; C14.2 v1(60.2,3.1) 61.295,3.1 TP11.1 R17.2
  Top Layer w0.508: U3.21 v1(33.604,18.996) 34.704,18.996 C9.2 ; C10.2 U2.1@52.33,5.1
5V: C20.2 J1.2 R6.1 U5.6 | length 2.9
  Top Layer w0.254: U5.6 41.225,51.675 v1(41.5,51.4) ; R6.1 C20.2@45.1,53.6
  other v1: 72.6,51.1 72.6,52.1 45.1,52.8 72.6,53.2 72.6,54.2 72.5,55
ADC_IN_VREFP: TP23.1 U3.34 | length 2.8
  Top Layer w0.254: TP23.1 28.544,34.256 U3.34
"Audio +_6": C22.2 J4.2 U5.5 | length 5.5
  Top Layer w0.254: J4.2 41.525,53.884 41.875,53.534 U5.5
"Audio -_6": C18.2 J4.1 U5.8 | length 5.5
  Top Layer w0.254: U5.8 39.925,53.525 40.275,53.875 J4.1
"Audio V_S\D\_1": R38.2 U3.36 U5.1 | length 28
  Top Layer w0.254: U3.36 26.144,38.744 28.3,40.9 34.144,40.9 35.1,41.856 35.1,47.2 36.525,48.625 U5.1
CBUS0_4: D1.2 U1.6 | length 5.2
  Top Layer w0.254: U1.6 9.684,42.916 10.3,42.3 11.465,42.3 D1.2
DAC_OUT_VREFP: TP24.1 U3.33 | length 3.2
  Top Layer w0.254: U3.33 29.744,32.844 TP24.1
"DEBUG INPUT_3": R16.1 U3.22 | length 10
  Top Layer w0.254: U3.22 37.604,20.196 39.3,18.5 R16.1
FLASH_MEM_SPI_SS: R19.1 SD1.2 TP21.1 U3.37 | length 45.4
  Top Layer w0.254: v1(20.6,22) 20.6,28 21.8,29.2 24.2,29.2 24.944,29.944 U3.37 ; SD1.2 25.225,2.325 25.3,2.4 ; v1(25.3,5.1) 25.3,2.4 ; R19.1 33.3,3.8 33.3,3 TP21.1 ; R19.1@33.2,3.6 26.5,3.6 25.3,2.4
  Bottom Layer w0.254: v1(20.6,22) 25.3,17.3 v1(25.3,5.1)
GND: B1.3 B1.4 B2.3 B2.4 C1.1 C2.1 C3.1 C4.1 C5.1 C6.1 C7.1 C8.1 C9.1 C10.1 C11.1 C12.1 C13.1 C14.1 C16.1 C17.1 C18.1 C19.2 C20.1 C22.1 C23.1 D2.1 J1.1 J1.3 J2.5 J2.6 J2.7 J2.8 J2.9 J2.10 J2.11 P1.1 P1.SH1 P1.SH2 P2.1 R14.1 R27.1 R30.3 R32.1 R34.1 R38.1 SD1.6 SD1.10 SD1.11 SD1.12 TP3.1 TP12.1 U1.5 U1.13 U2.3 U2.5 U2.9 U3.0 U3.1 U3.10 U3.17 U3.20 U3.32 U3.42 U3.51 U4.4 U5.7 U6.1 U6.4 U7.4 | length 96.8
  Top Layer w0.203: J2.5 13.94,55.491 J2.6
  Top Layer w0.254: U1.5 9.744,44.584 10.155,44.584 10.771,45.2 U1.13@11.1,44.871 ; U3.0@11.512,24.009 11.512,26.191 13.73,26.191 U3.0@13.73,24.009 ; D2.1 12.686,51.486 v1(12.7,51.5) ; C6.1 13.7,48.1 v1(13.7,47.4) ; v1(19.5,44.6) C23.1 ; v1(37.6,55.1) C18.1 ; C22.1 v1(44,55.1) ; C20.1 v1(46.6,54.7) ; C20.1@47,54.1 C16.1 ; v1(48.05,46.05) U4.4
  Top Layer w0.381: v1(3.9,42.5) C1.1 ; P1.SH1 v1(25.6,48.425) 26,48.025 P1.1 ; v1(26.3,43.1) U7.4 ; P1.SH2 v1(31.475,49.325) ; R38.1 v1(37.1,51.1) ; v1(40.575,51.075) U5.7
  Top Layer w0.508: U3.1 v1(8.144,19.844) ; U3.0@12.219,23.863 14.437,23.863 v1(16.237,23.863) ; U3.0@12.219,26.045 14.437,26.045 v1(16.255,26.045) ; v1(16.195,2.105) SD1.12 ; U3.10 v1(18.944,19.344) ; v1(18.944,30.4) U3.42 ; SD1.6 v1(20.825,2.825) ; U3.0@24.475,22.915 v1(26,22.915) U3.0@27.33,22.915 ; U3.0@24.475,25.839 v1(26,25.839) U3.0@27.33,25.839 ; U3.17 v1(27.344,19.456) ; SD1.11 v1(29.919,1.881) ; SD1.10 v1(29.894,11.606) ; v1(30.944,17.044) U3.20 ; U3.32 v1(30.944,32.644) ; TP3.1 v1@35,16.1 ; v1(35.1,16.2) C9.1 ; C13.1 v1(40.2,31) ; R14.1 v1(40.175,33.8) ; C12.1@39.5,28.9 v1(39.5,29.7) ; B1.4 v1(39.725,3.6) B1.3 ; v1(39.975,36.675) R30.3 ; C8.1 v1(42,12.8) ; v1(42.8,39.8) C19.2 ; R32.1 R34.1 ; v1(45.5,36.4) C17.1 ; R27.1 v1(45.5,44.5) ; C10.1 v1(47.6,6.6) ; C14.1@57.54,3.26 U2.9 ; C11.1 61.4,8.1 v1(62.1,8.1) ; TP12.1@67.475,2.375 v1(67.475,3.2) B2.3 B2.4
  Top Layer w0.762: C3.1 v1(4.2,50.8) 4.3,50.9 C2.1 ; C7.1 v1(4.7,48.5) ; J2.10 v1(8.9,58.166) J2.9 J2.8 v1(14,58.166) J2.7 15.265,56.816 J2.6 ; v1(7.8,48.2) C5.1 ; J2.11 8.065,58.087 ; v1(8.144,30.244) U3.51
  Bottom Layer w0.254: v1(13.7,47.4) v1@13.7,47.5
  Bottom Layer w0.508: v1@42.7,39.8 v1(42.8,39.8) ; v1(62.1,8.1) v1@62.2,8.1
  other v1: 11.1,44.5 11.1,45.2 11.1,45.9
  other v2: 43.7,27 64.3,42.7 66.1,42.8 64.1,43.6 66.1,43.6 59.1,51.1 58.94,52.2 58.94,54.1 59,55.2
I2C_SCL_1: P1.4 P2.4 R9.1 TP6.1 U3.39 U7.2 | length 32.3
  Top Layer w0.203: U3.39 22.544,36.144 24.4,38 v1(24.4,43.2) ; v1@29.825,44.6 U7.2 29.325,44.775 29,45.1 P1.4 29,50.8 30.1,51.9 P2.4 ; v1(29.9,44.6) R9.1 32.2,45 TP6.1
  Bottom Layer w0.203: v1(24.4,43.2) 25.8,44.6 v1(29.9,44.6)
I2C_SDA_1: P1.3 P2.3 R8.1 TP7.1 U3.38 U7.3 | length 28.9
  Top Layer w0.203: TP7.1 23.9,46.5 25.1,45.3 R8.1 ; U3.38 23.744,35.744 25.1,37.1 R8.1 ; P2.3 28.1,46.9 P1.3 28,45.6 27.275,44.875 U7.3 25.6,44.1 R8.1
JOYSTICK_X_1: R31.1 R32.2 TP9.1 U3.27 | length 11.3
  Top Layer w0.254: U3.27 41.904,26.196 R32.2 R31.1
JOYSTICK_Y_1: R33.1 R34.2 TP10.1 U3.28 | length 11
  Top Layer w0.254: U3.28 TP10.1 R34.2@41.704,27.396 ; R34.2 R33.1
MCU_LED: DS1.2 U3.16 | length 17.3
  Top Layer w0.254: DS1.2 13.5,10.8 17.6,14.9 23.8,14.9 26.144,17.244 U3.16
MCU_RESET: C11.2 R17.1 R18.2 TP15.1 U2.10 U3.24 | length 38.5
  Top Layer w0.254: U3.24 TP15.1@36.404,22.596 ; TP15.1 TP15.1@36.404,22.596 ; v1(52.6,9.6) 39.8,22.4 36.6,22.4 TP15.1@36.404,22.596 ; U2.10 59.6,6.5 R18.2 ; R17.1 R18.2 ; C11.2 R18.2
  Bottom Layer w0.254: v1(52.6,9.6) 56.5,9.6 57.54,8.56 U2.10
MCU_RX_UART_CLI_1: TP4.1 U1.7 U3.44 | length 15
  Top Layer w0.254: U1.7 14.125,44.075 16.544,41.655 U3.44
MCU_TX_UART_CLI_1: TP2.1 U1.10 U3.43 | length 17.3
  Top Layer w0.254: U1.10 14.95,45.425 15.55,44.825 15.55,43.75 17.744,41.555 U3.43
MEM_SPI_CLK: R13.2 SD1.5 TP20.1 | length 24.1
  Top Layer w0.254: R13.2 TP20.1 9.1,7.9 9.7,7.3 19.6,7.3 21.925,4.976 SD1.5
MEM_SPI_MISO: R12.2 SD1.7 TP19.1 | length 28.5
  Top Layer w0.254: R12.2 9.05,15.85 TP19.1 7.6,14.5 7.6,13.7 6.437,12.537 6.437,7.563 8.8,5.2 18.2,5.2 19.725,3.675 SD1.7
MEM_SPI_MOSI: R11.2 SD1.3 TP18.1 | length 31.1
  Top Layer w0.254: R11.2 9.05,14.15 7.4,12.5 7.4,8 9,6.4 v1(18.9,6.4) ; v1(24.025,6.4) 24.025,1.856 SD1.3
  Bottom Layer w0.254: v1(18.9,6.4) v1(24.025,6.4)
NetB1_1: B1.1 B1.2 D3.2 | length 7.3
  Top Layer w0.254: B1.2 B1.1 D3.2@41.875,9.075
NetB2_1: B2.1 B2.2 R18.1 | length 8.2
  Top Layer w0.254: R18.1 65.325,6.6 ; B2.1 65.325,6.6 ; B2.2 65.325,6.6
NetC8_2: C8.2 R15.2 R16.2 | length 3.5
  Top Layer w0.254: R15.2 C8.2 40.9,14.6 R16.2
NetC15_1: C15.1 R25.1 R27.2 U4.3 | length 7.7
  Top Layer w0.254: C15.1 45.75,42.15 R25.1 47.4,43.3 R27.2 48.7,43.6 49.3,44.2 U4.3
NetC15_2: C15.2 C17.2 L1.2 R24.1 R25.2 | length 12
  Top Layer w0.254: C17.2 45.5,40.3 C15.2 46.8,40.4 R24.1 ; R25.2 47.4,40.2 R24.1 ; L1.2 52.67,35.425 48.095,40 R24.1
NetC16_2: C16.2 R23.2 R26.1 U4.1 U4.6 | length 8.1
  Top Layer w0.254: U4.1 49.3,47.6 49.8,48.1 ; U4.6 49.8,48.1 ; C16.2@50,54 R26.1 49.8,49.8 49.8,48.1
NetC19_1: C19.1 R28.1 | length 2.1
  Top Layer w0.254: C19.1 R28.1 R28.1@42.9,44.1
NetC21_1: C21.1 R29.1 | length 2
  Top Layer w0.254: C21.1 38.7,44.1 R29.1
NetC21_2: C21.2 R30.2 | length 3.7
  Top Layer w0.254: R30.2 38.975,41.75 40.2,42.975 C21.2
NetD1_1: D1.1 R3.1 | length 1.8
  Top Layer w0.381: R3.1 D1.1
NetD3_1: D3.1 R15.1 | length 3.6
  Top Layer w0.254: R15.1 39.4,9.45 D3.1
NetDS1_1: DS1.1 R10.2 | length 1.5
  Top Layer w0.254: DS1.1 11.22,10.645 R10.2
NetL1_1: L1.1 U4.5 | length 6.3
  Top Layer w0.254: U4.5 49.8,44.375 52.7,41.475 L1.1
NetR26_2: R26.2 U4.2 | length 3
  Top Layer w0.254: R26.2 48.8,49.6 U4.2
NetR28_2: R28.2 U5.4 | length 3
  Top Layer w0.254: U5.4 41.875,46.925 R28.2
NetR29_2: R29.2 U5.3 | length 2.9
  Top Layer w0.254: R29.2 41.225,46.725 U5.3
NetR31_2: R31.2 U6.2 | length 35.1
  Top Layer w0.254: R31.2 v3(53.73,24.5)
  Bottom Layer w0.254: v3(53.73,24.5) 73.15,24.5 U6.2
NetR33_2: R33.2 U6.5 | length 31.3
  Top Layer w0.254: R33.2 63,29.4 68.3,24.1 U6.5
NetR35_2: R35.2 U7.1 | length 2.4
  Top Layer w0.203: U7.1 R35.2@31.7,43.1
RS_4: C7.2 R4.2 R5.2 U1.2 | length 6.7
  Top Layer w0.203: R4.2 R5.2 ; C7.2 6.325,47.575 6.325,45.875 U1.2
SD_CARD_DETECT: R20.1 SD1.9 TP17.1 | length 5.6
  Top Layer w0.254: SD1.9 32.906,7.906 32.906,6.395 R20.1
SERCOM1_PAD2_SPI_MISO: R12.1 U3.8 | length 5.5
  Top Layer w0.254: R12.1 15.45,15.85 16.544,16.945 U3.8
SERCOM1_PAD2_SPI_MOSI: R11.1 U3.11 | length 9.4
  Top Layer w0.254: R11.1 14.75,14.15 17.2,16.6 19.244,16.6 20.144,17.5 U3.11
SERCOM1_PAD3_SPI_SCK: R13.1 U3.12 | length 11.5
  Top Layer w0.254: R13.1 14.1,12.5 17.4,15.8 19.9,15.8 21.344,17.244 U3.12
SPEAKER_OUT_1: R14.2 R30.1 TP8.1 U3.31 | length 10.4
  Top Layer w0.254: U3.31 32.896,30.996 35.7,33.8 R14.2 37.8,37.425 R30.1
SWCLK: TP14.1 U2.4 U3.25 | length 30.3
  Top Layer w0.254: U3.25 TP14.1 39.479,23.796 53.73,9.545 U2.4
SWDIO: TP13.1 U2.2 U3.26 | length 34.3
  Top Layer w0.254: U3.26 TP13.1@36.4,24.996 ; TP13.1 39,25.1 55.3,8.8 v1(55.3,8.2)
  Bottom Layer w0.254: U2.2 52.46,7.26 53.4,8.2 v1(55.3,8.2)
USB_DATA_N: C5.2 D2.3 J2.2 R1.1 | length 8.3
  Top Layer w0.203: C5.2 8.629,49.771 R1.1 10.792,50.301 10.792,52.464 D2.3@10.071,53.186 ; D2.3 D2.3@10.071,53.186 ; J2.2 10.614,55.393 10.614,54.581 10.711,54.483 10.711,53.827 D2.3@10.071,53.186
USB_DATA_P: C6.2 D2.2 J2.3 R2.1 | length 8.2
  Top Layer w0.203: J2.3@11.249,55.27 11.169,55.19 11.169,53.988 D2.2@11.97,53.186 ; D2.2 D2.2@11.97,53.186 ; C6.2 13.571,49.771 R2.1 11.249,50.435 11.249,52.464 D2.2@11.97,53.186
USB_FTDI_DATA_4_N: R1.2 U1.1 | length 2.9
  Top Layer w0.203: U1.1 10.322,46.963 10.698,46.963 10.858,47.124 10.858,47.704 10.739,47.823 10.61,47.823 R1.2
USB_FTDI_DATA_4_P: R2.2 U1.12 | length 2.9
  Top Layer w0.203: R2.2 11.564,47.823 11.435,47.823 11.316,47.704 11.316,47.082 11.435,46.963 11.878,46.963 U1.12
VBUS: C2.2 D2.4 FB1.1 J2.1 | length 9.5
  Top Layer w0.203: J2.1@9.865,54.871 J2.1
  Top Layer w0.508: FB1.1 5.791,53.609 C2.2 8.914,52.5 8.992,52.578 ; J2.1@9.865,54.871 8.992,53.997 8.992,52.578 ; D2.4@9.958,51.273 10.008,51.273 D2.4 10.02,51.874 9.545,52.349 9.22,52.349 8.992,52.578
VCCIO_4: C1.2 R4.1 U1.3 U1.9 | length 18.4
  Top Layer w0.203: C1.2 6.584,42.5 v1(7.084,43) 7.3,43.216 7.3,44.8 7.925,45.425 U1.3 ; U1.9 14.025,44.975 v1(14.2,44.8)
  Top Layer w0.381: R4.1 6.3,42.7 C1.2
  Bottom Layer w0.203: v1(7.084,43) 13.8,43 14.2,43.4 v1(14.2,44.8)
VIN: R6.2 R23.1 | length 1.7
  Top Layer w0.762: R6.2 R23.1
VOUT: R7.1 R24.2 | length 1.6
  Top Layer w0.254: R7.1 R24.2
VUSB: C3.2 C4.2 FB1.2 R3.2 R5.1 TP1.1 U1.4 | length 24.2
  Top Layer w0.203: R3.2 7.4,41.9 8.065,42.565 8.065,44.285 8.755,44.975 U1.4
  Top Layer w0.381: C4.2@2.6,51.8 FB1.2 ; C4.2 2.7,46.5 TP1.1@3.3,45.9 ; R5.1 2.9,45.9 2.9,41.9 3.9,40.9 R3.2
XIN_32_3: C12.2 U3.29 X1.1 | length 5.6
  Top Layer w0.254: U3.29 37.596,28.596 C12.2@37.9,28.9
XOUT_32_3: C13.2 U3.30 X1.2 | length 5.9
  Top Layer w0.254: U3.30 34.402,29.796 35.606,31 C13.2
pads on no net: FD1. FD2. FD3. J1. J2.4 SD1.1 SD1.8 SD1.13 SD1.14 U1.8 U1.11 U2.6 U2.7 U2.8 U3.2 U3.3 U3.4 U3.5 U3.6 U3.9 U3.13 U3.14 U3.15 U3.18 U3.19 U3.23 U3.35 U3.40 U3.41 U3.45 U3.46 U3.47 U3.48 U3.49 U3.50 U5.2 U7.5

## Polygon pours and split planes (outlines as drawn)
GND on GND (split plane): 203 vertices, not listed, extent 0.51,0.51 79.49,59.49
3.3V on VCC (split plane): 38.017,59.489 38.017,44.75 38.025,44.675 38.046,44.603 38.082,44.537 38.129,44.479 38.187,44.432 38.253,44.396 38.325,44.375 38.4,44.367 79.49,44.367 79.49,15.694 42.271,15.694 42.271,35.388 42.271,35.812 42.264,35.886 42.242,35.958 42.207,36.024 42.159,36.082 42.101,36.13 42.035,36.165 41.963,36.187 41.888,36.194 6.788,36.194 6.784,36.2 6.778,36.205 6.774,36.21 6.71,36.274 6.705,36.278 6.7,36.284 6.666,36.31 6.633,36.337 6.627,36.341 6.621,36.345 6.545,36.393 6.539,36.396 6.533,36.4 6.494,36.418 6.456,36.437 6.448,36.439 6.442,36.442 6.357,36.472 6.35,36.474 6.343,36.477 6.302,36.485 6.26,36.496 6.253,36.496 6.246,36.497 6.157,36.507 6.128,36.508 6.1,36.51 0.51,36.51 0.51,59.489 5.593,59.489 5.608,59.475 5.611,59.472 5.614,59.469 5.651,59.442 5.688,59.415 5.691,59.413 5.695,59.411 5.883,59.3 5.887,59.299 5.89,59.296 5.932,59.278 5.974,59.259 5.978,59.258 5.982,59.256 6.189,59.188 6.193,59.187 6.197,59.185 6.242,59.176 6.287,59.166 6.291,59.166 6.295,59.165 6.513,59.142 6.539,59.142 6.566,59.14 16.566,59.14 16.593,59.142 16.619,59.142 16.837,59.165 16.841,59.166 16.845,59.166 16.89,59.176 16.935,59.185 16.939,59.187 16.943,59.188 17.151,59.256 17.155,59.258 17.159,59.259 17.2,59.278 17.242,59.297 17.246,59.299 17.25,59.301 17.438,59.412 17.442,59.414 17.446,59.416 17.482,59.444 17.519,59.47 17.522,59.474 17.526,59.476 17.54,59.49
3V3 on VCC (split plane): 41.506,35.388 41.506,15.312 41.513,15.237 41.535,15.165 41.57,15.099 41.618,15.041 41.676,14.993 41.742,14.958 41.814,14.936 41.888,14.929 79.49,14.929 79.49,0.51 0.51,0.51 0.51,13.49 6.1,13.49 6.128,13.492 6.157,13.493 6.246,13.503 6.253,13.504 6.26,13.504 6.302,13.514 6.343,13.523 6.35,13.526 6.357,13.528 6.442,13.558 6.449,13.561 6.456,13.562 6.494,13.582 6.533,13.6 6.539,13.604 6.545,13.607 6.621,13.655 6.627,13.659 6.633,13.663 6.666,13.69 6.7,13.716 6.705,13.721 6.71,13.726 6.774,13.789 6.778,13.795 6.784,13.8 6.81,13.834 6.837,13.867 6.841,13.873 6.845,13.879 6.893,13.955 6.896,13.961 6.9,13.967 6.918,14.006 6.938,14.045 6.939,14.051 6.942,14.058 6.972,14.143 6.974,14.15 6.977,14.156 6.986,14.198 6.996,14.24 6.996,14.247 6.997,14.254 7.007,14.343 7.008,14.372 7.01,14.4 7.01,35.429 41.506,35.429
5V on VCC (split plane): 79.49,45.133 38.783,45.133 38.783,59.27 38.808,59.259 38.812,59.258 38.816,59.256 39.023,59.188 39.027,59.187 39.031,59.185 39.076,59.176 39.121,59.166 39.125,59.166 39.129,59.165 39.347,59.142 39.373,59.142 39.4,59.14 49.4,59.14 49.427,59.142 49.453,59.142 49.671,59.165 49.675,59.166 49.679,59.166 49.724,59.176 49.769,59.185 49.773,59.187 49.777,59.188 49.985,59.256 49.989,59.258 49.993,59.259 50.034,59.278 50.076,59.297 50.08,59.299 50.084,59.301 50.272,59.412 50.276,59.414 50.28,59.416 50.316,59.444 50.353,59.47 50.356,59.474 50.36,59.476 50.374,59.49 79.49,59.49

## Other copper
GND (plane layer: these items are gaps in the copper):
  lines w0.762: 0,36 0,60 ; 0,60 0,0 0.2,-0.2 79.8,-0.2 80,0 80,59.8 79.8,60 0,60 ; 0,60 0,60
VCC (plane layer: these items are gaps in the copper):
  lines w0.762: 6.287,35.812 41.888,35.812 41.888,35.388 41.888,15.312 79.988,15.312 80,15.3 80,0 ; 6.495,35.739 6.495,14.355 6.149,14.01 0.01,14.01 0,14 0,0 ; 38.4,60.1 38.4,44.75 80,44.75 80,59.8 79.9,59.9 38.724,59.9 ; 0,0 0,0 ; 0,0 80,0 ; 80,0 80,0

## Silkscreen, mask and mechanical layers (free items; w line width, h text height)
Top Overlay:
  text "Team C&K / Changran Liu & Kaiwen Zhou" at 55.3,11.25 h0.9
Mechanical 4:
  lines w0.508: 16.793,0 17.075,0.259 17.282,0.327 17.5,0.35 27.5,0.35 27.717,0.327 27.925,0.259 28.114,0.149 28.275,0.001 ; 16.8,0 0,0 0,14 6.1,14 6.189,14.01 6.274,14.039 6.35,14.087 6.413,14.15 6.461,14.226 6.49,14.311 6.5,14.4 6.5,35.6 6.49,35.689 6.461,35.774 6.413,35.85 6.35,35.913 6.274,35.961 6.189,35.99 6.1,36 0,36 0,60 5.791,59.999 5.952,59.851 6.141,59.741 6.349,59.673 6.566,59.65 16.566,59.65 16.784,59.673 16.991,59.741 17.18,59.852 17.341,60 50.175,59.998 ; 28.3,0 80,0 80,60 50.107,60

## Text inside footprints (layer, text, board x,y; h text height)
J2: Mechanical 1 "Board edge" at 5.577,59.495 h0.76 r180
U6: Top Overlay "1" at 78.879,31.804 h0.76